# Altium PCB NTC.PcbDoc
Units mm, origin at the board's own origin, x right, y up, seen from the top; angles counter-clockwise.
Board outline 48.89 x 31.11 mm, 2 copper layers (Top Layer, Bottom Layer); 15 components, 36 nets, 59 pads, 11 vias.
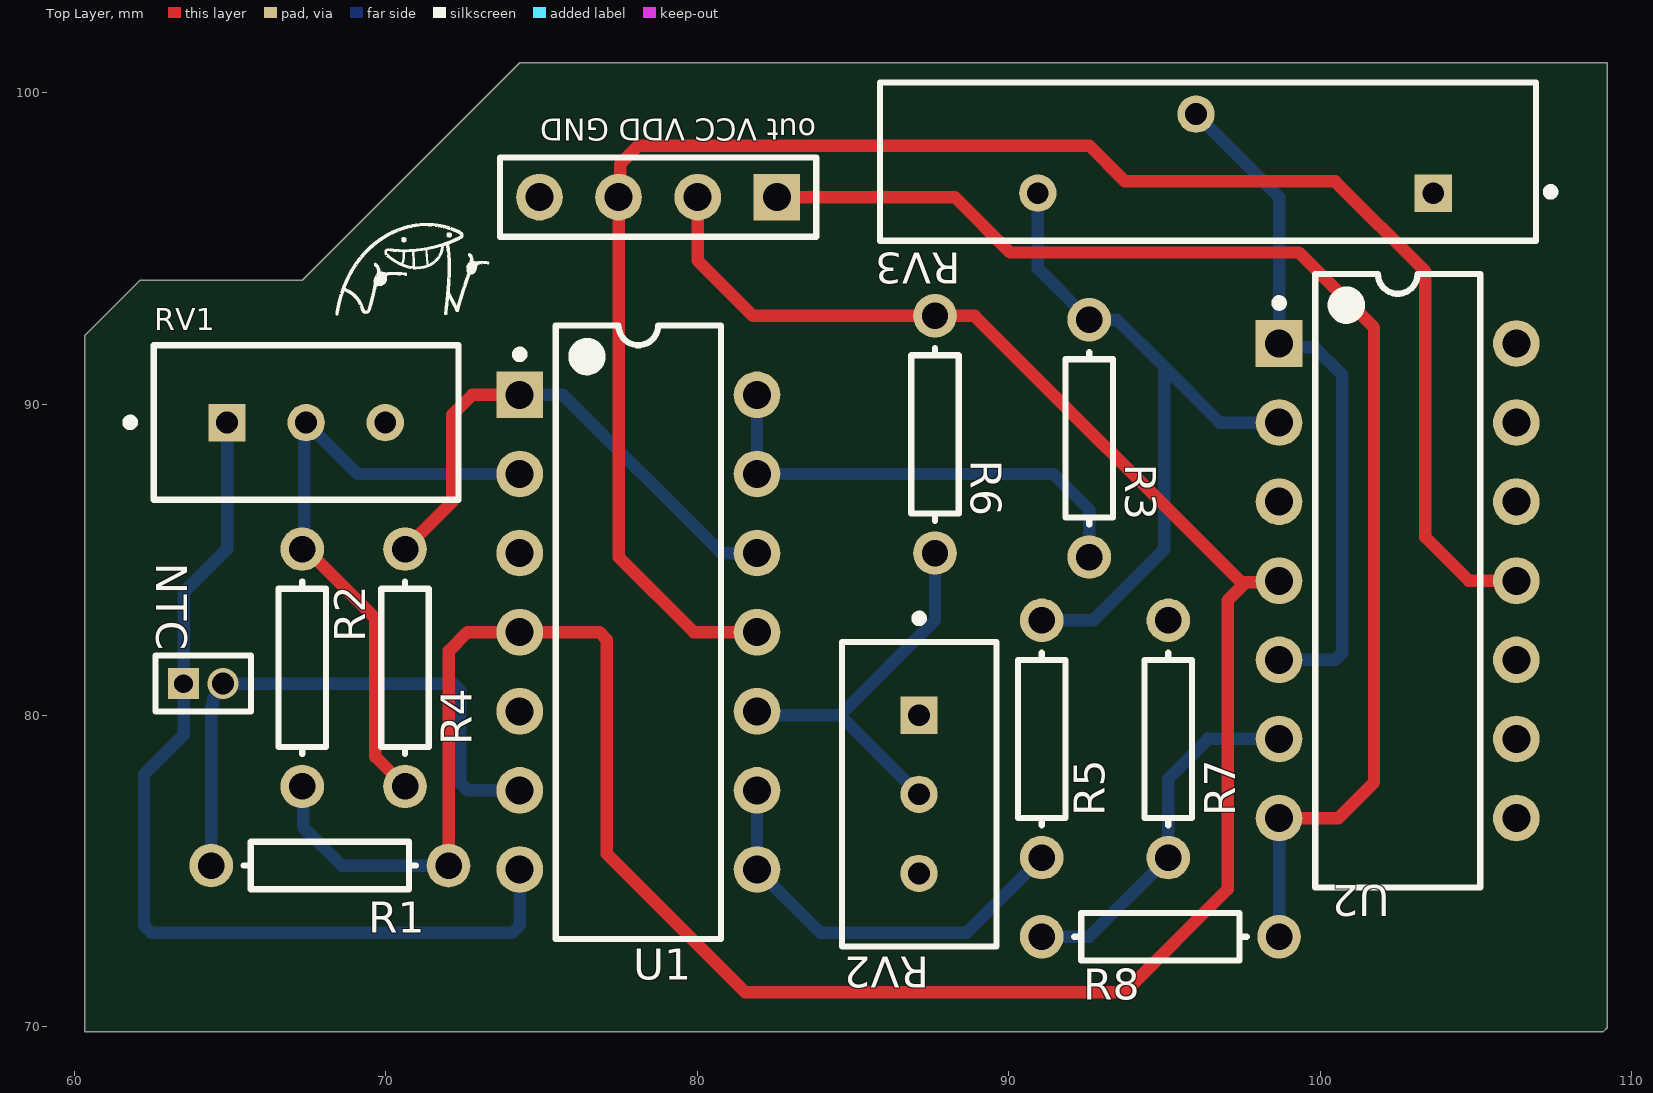
[diagram p0: Top Layer view]
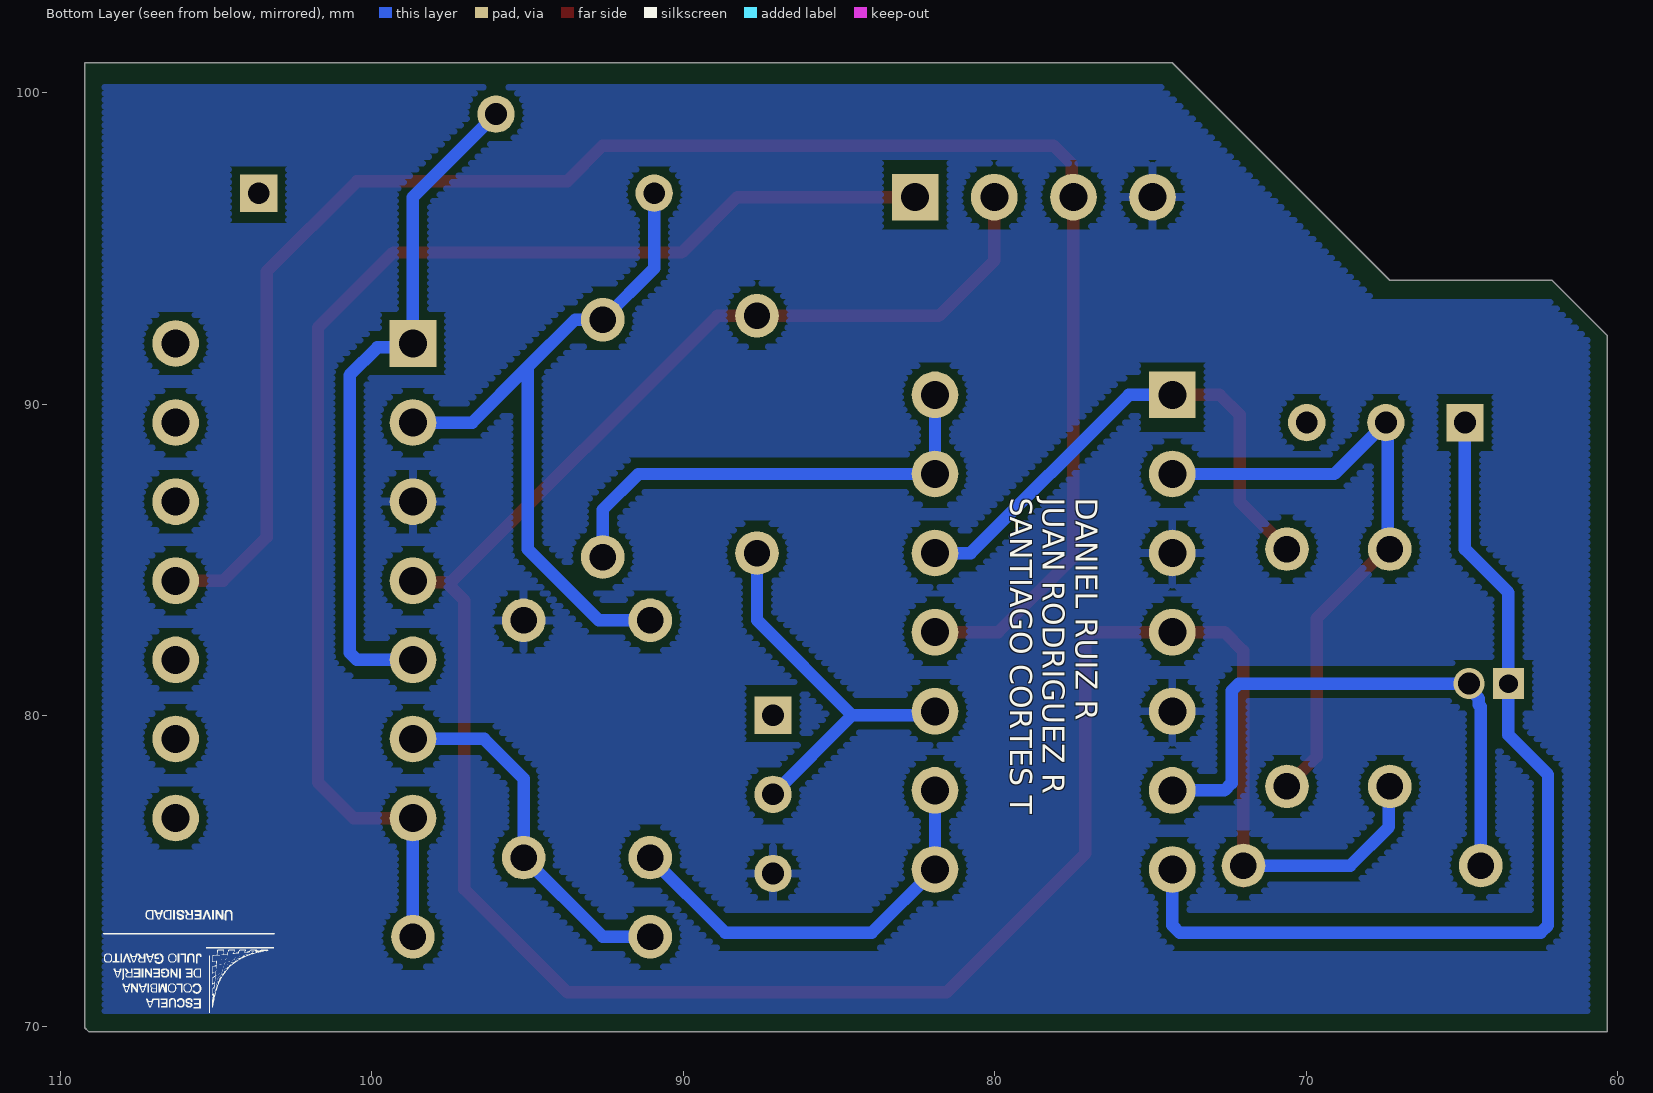
[diagram p1: Bottom Layer view, seen from below]

## Layer stack, top to bottom
Top Solder: solder mask 0.0102, Solder Resist, Dk 3.5
Top Layer: signal copper 0.0356
Dielectric 1: dielectric 0.32, FR-4, Dk 4.8
Bottom Layer: signal copper 0.0356
Bottom Solder: solder mask 0.0102, Solder Resist, Dk 3.5

## Board outline
60.325,69.85 60.325,92.202 62.103,93.98 67.31,93.98 74.295,100.965 109.22,100.965 109.22,69.977 109.093,69.85

## Design rules (kind name [scope] priority, off if disabled: settings)
Clearance Clearance_1 [All] p1: gap=0.25 ignorepadtopadclearanceinfootprint=FALSE
PlaneConnect [InNet('GND')] p1: planeconnectstyle=Relief reliefexpansion=0 reliefentries=4 reliefconductorwidth=0 reliefairgap=0
PolygonConnect [All] p1: connectstyle=Relief reliefconductorwidth=0.254 reliefentries=4 polygonreliefangle="90 Angle" airgapwidth=0.254
RoutingVias [All] p1: holewidth=0.711 width=1.27 viastyle="Through Hole" minholewidth=0.711 minwidth=1.27 maxholewidth=0.711 maxwidth=1.27
SolderMaskExpansion [All] p1: expansion=0.102 istentingtop=FALSE
Width [All] p1: maxlimit=5 minlimit=0.254 preferedwidth=0.4
29 further rules are at their usual default settings.

## Classes and differential pairs
component class Micro: D? R? U4

## Components (designator, comment, footprint, x,y, rotation, side; value= is the part's Value field where it differs from the comment)
NTC "Thermoresistor" MHDR1X2 63.5,81.026 r0 top
"out VCC VDD GND" "Header 4" HDR1X4 82.55,96.647 r180 top (schematic designator IN/OUT)
R1 "Res1" AXIAL-0.3 68.199,75.184 r0 top value=100k
R2 "Res1" AXIAL-0.3 67.31,81.534 r270 top value=100k
R3 "Res1" AXIAL-0.3 92.583,88.9 r90 top value=1K
R4 "Res1" AXIAL-0.3 70.612,81.534 r90 top value=10k
R5 "Res1" AXIAL-0.3 91.059,79.248 r90 top value=1K
R6 "Res1" AXIAL-0.3 87.63,89.027 r90 top value=10k
R7 "Res1" AXIAL-0.3 95.123,79.248 r90 top value=10k
R8 "Res1" AXIAL-0.3 94.869,72.898 r0 top value=100k
RV1 "3296W-1-504LF" FP-3296W-MFG 67.437,89.413 r180 top value=725
RV2 "3296W-1-504LF" FP-3296W-MFG 87.122,77.47 r90 top value=725
RV3 "3006P-1-103LF" FP-3006P-MFG 96.397,97.789 r180 top
U1 "LF347N" N0014A 78.105,82.677 r0 top
U2 "LF347N" N0014A 102.489,84.328 r0 top

## Footprints (in the part's own frame and the unit in brackets; to place one, negate y for a bottom-side part, rotate by r counter-clockwise, add the part's x,y. Pads: shape width x height; smd on the part's side, far side on the other; paste and mask are expansions set on the pad)
AXIAL-0.3 [mm] "Axial Device, Thru-Hole; 2 Leads; 0.3 in Pin Spacing"
  round 1.4 hole 0.85: 1(-3.81,0) 2(3.81,0)
  silkscreen extent -2.77,-0.76 2.77,0.76
FP-3006P-MFG [mm]
  rect 1.2x1.2 hole 0.7 paste-2539.97 mask+0: 1(-7.235,1.015)
  round 1.2 hole 0.7 paste-2539.97 mask+0: 2(0.385,-1.525) 3(5.465,1.015)
  silkscreen extent -11.13,-2.54 10.54,2.54, body extent -10.64,-2.64 10.64,2.64, height 0.25
FP-3296W-MFG [mm]
  rect 1.2x1.2 hole 0.7 paste-2539.97 mask+0: 1(2.54,0.005)
  round 1.2 hole 0.7 paste-2539.97 mask+0: 2(0,0.005) 3(-2.54,0.005)
  silkscreen extent -4.89,-2.48 5.77,2.48, body extent -4.99,-2.58 4.99,2.58, height 0.25
HDR1X4 [mm] "Connector; Header; 4 Position"
  rect 1.5x1.5 hole 0.9: 1(0,0)
  round 1.5 hole 0.9: 2(2.54,0) 3(5.08,0) 4(7.62,0)
  silkscreen extent -1.27,-1.27 8.89,1.27
MHDR1X2 [mm] "Connector; Header; 2 Position"
  rect 1x1 hole 0.6: 1(0,0)
  round 1 hole 0.6: 2(1.27,0)
  silkscreen extent -0.9,-0.9 2.17,0.9
N0014A [mm] "DIP, 14-Leads, Body 19.7x6.6mm, Pitch 2.54mm"
  rect 1.5x1.5 hole 0.9: 1(-3.81,7.62)
  round 1.5 hole 0.9: 2(-3.81,5.08) 3(-3.81,2.54) 4(-3.81,0) 5(-3.81,-2.54) 6(-3.81,-5.08) 7(-3.81,-7.62) 8(3.81,-7.62) 9(3.81,-5.08) 10(3.81,-2.54) 11(3.81,0) 12(3.81,2.54) 13(3.81,5.08) 14(3.81,7.62)
  silkscreen extent -3.93,-9.85 2.65,9.85, body extent -3.95,-9.85 3.95,9.85, height 5.08

## Part data
NTC: library part MHDR1X2, "Header, 2-Pin", LatestRevisionDate=17-Jul-2002, LatestRevisionNote="Re-released for DXP Platform.", Publisher="Altium Limited"
"out VCC VDD GND": "Header, 4-Pin / 1 for out / 2 for Vcc / 3 for Vdd / 4 for GND", LatestRevisionDate=17-Jul-2002, LatestRevisionNote="Re-released for DXP Platform.", Publisher="Altium Limited"
R1 R2 R3 R4 R5 R6 R7 R8: "Resistor", LatestRevisionDate=17-Jul-2002, LatestRevisionNote="Re-released for DXP Platform.", PackageDescription="Axial Device, Thru-Hole; 2 Leads; 0.3 in Pin Spacing", PackageReference=AXIAL-0.3, Published=8-Jun-2000, Publisher="Altium Limited"
RV1 RV2: library part CMP-2000-05583-2, "TRIMMER 500K OHM 0.5W PC PIN TOP", Manufacturer=Bourns, Package=3296W, Power Rating=0.5W, Resistance=1k, Temperature="-55°C to +125°C", Temperature Coefficient=100ppm/°C, Temperature Range High=+125°C, Temperature Range Low=-55°C, Tolerance=10%, Voltage Rating=300V, Automotive=No, Category=Res, ComponentLink2Description=Datasheet, ComponentLink2URL=https://www.bourns.com/docs/Product-Datasheets/3296.pdf, Device Class L1="Passive Components", Device Class L2=Resistors, Device Class L3="Variable Resistors and Potentiometers", Digikey Description="TRIMMER 500K OHM 0.5W PC PIN TOP", Height=12.05mm, Lead Free=Yes, Manufacturer Part Number=3296W-1-504LF, Mouser Description="Trimmer; Cermet; Rest 500 Kilohms; PCB; 25 Turns; Pwr-Rtg 0.5W", Octopart=https://octopart.com/3296w-1-504lf-bourns-143884, RoHS=TRUE, Series="Trimpot 3296-Sealed", Standoff Height=0.38mm
RV3: library part CMP-07234-000047-1, "TRIMMER 10KOHM 0.75W PC PIN SIDE", Color=Blue, Insulation Resistance=1GR, Manufacturer Series=3006, Max Operating Temperature=125°C, Max Power Dissipation=750mW, Min Operating Temperature=-55°C, Package Quantity=100, Resistance=50k, Resistance Law=Linear, Resistance Tolerance=10%, Resistor Type=Cermet, Temperature Coefficient=100ppm/°C, Actuator Orientation=Horizontal, Actuator Type=SCREW, Depth=4.83mm, Height=6.35mm, Lead Free="Lead Free", Length=20.57mm, Military Standard=Not, Mount=Panel, Number of Pins=3, Number of Terminals/Pins=3, Number of Turns=15, Packaging=Rail/Tube, Pin Diameter=0.6mm, Pitch=2.5mm, Power Rating=750mW, Radiation Hardening=No, REACH SVHC="No SVHC", RoHS Compliant=Yes, Series=3006, Taper=Linear, Technology=CERMET, Terminal Finish=Tin, Termination=Pin, Thickness=5.59mm, Tolerance=10%, Type=Potentiometer, Weight=0.04oz, Width=4.83mm
U1 U2: library part CMP-0055-00229-3, "Wide Bandwidth Quad JFET Input Operational Amplifier, 14-pin MDIP", Manufacturer="Texas Instruments", Package Reference=N0014A, PackageTopMarking=NSUZXYYTTE#*LF347N, PowerWise=N, Code_JEDEC=MS-001-AA, ComponentLink1Description="Datasheet URL", ComponentLink1URL=http://www.ti.com/general/docs/lit/getliterature.tsp?genericPartNumber=LF347&fileType=pdf, CompType=Amplifiers, PackageDescription="MDIP, .750 x .250 x.130in, 14 Lead, .100in Pitch", PinCount=14, RoHS=N

## Via types
v1: diameter 1.27, hole 0.711, Top Layer to Bottom Layer, 10 vias
v2: diameter 1, hole 0.711, Top Layer to Bottom Layer, 1 vias

## Nets (pads, with @x,y where several pads share a name; then routed paths per layer and width w, separated by ;. In a path a pad name is that pad's centre, name@x,y a point inside that pad or via, vN(x,y) a via of type N, cw(c..) or ccw(c..) an arc to the next point about the centre after c; other vN are vias at no path point)
GND: "out VCC VDD GND.4" R7.2 RV2.3 U1.3 U1.5 U2.3
NetC1_1: 
NetC2_2: 
NetC5_1: 
NetC6_2: 
NetD1_2: 
NetD3_2: 
NetD?_1: 
NetIN/OUT_1: "out VCC VDD GND.1" R8.2 U2.7 | length 42.8
  Top Layer w0.4: v1(82.55,96.647) 88.265,96.647 90.043,94.869 99.314,94.869 101.727,92.456 101.727,77.851 100.584,76.708 v1(98.679,76.708)
  Bottom Layer w0.4: R8.2 v1(98.679,76.708)
NetLM7805_1: 
NetLM7805_3: 
NetMO-in_3: 
NetMO-in_4: 
NetMO_out_2: 
NetMO_out_3: 
NetMO_out_4: 
NetNTC_1: NTC.1 RV1.1 U1.7 | length 31.3
  Bottom Layer w0.4: RV1.1 64.897,85.344 63.5,83.947 NTC.1 63.5,79.375 62.23,78.105 62.23,73.259 62.464,73.025 74.061,73.025 74.295,73.259 U1.7
NetNTC_2: NTC.2 R1.1 U1.6 | length 18.7
  Bottom Layer w0.4: R1.1 64.389,80.279 64.45,80.34 64.45,80.544 64.77,80.864 v2(64.77,81.026) 72.156,81.026 72.39,80.792 72.39,77.831 72.624,77.597 U1.6
NetP_galga_4: 
NetR2_1: R2.1 R4.1 RV1.2 U1.2 | length 20.7
  Top Layer w0.4: v1(67.31,85.344) 67.437,85.344 69.659,83.121 69.659,78.676 v1(70.612,77.724)
  Bottom Layer w0.4: v1(67.31,85.344) 67.373,85.407 67.373,89.344 RV1.2 69.088,87.757 U1.2
NetR3_1: R3.1 U1.13 U1.14 | length 15.2
  Bottom Layer w0.4: U1.14 U1.13 91.44,87.757 92.583,86.614 R3.1
NetR3_2: R3.2 R5.2 RV3.3 U2.2 | length 22.9
  Bottom Layer w0.4: RV3.3 90.932,94.361 R3.2 93.472,92.71 94.996,91.186 ; R5.2 92.71,83.058 94.996,85.344 94.996,91.186 ; U2.2 96.774,89.408 94.996,91.186
NetR4_2: R4.2 U1.1 U1.12 | length 17.1
  Top Layer w0.4: v1(70.612,85.344) 72.136,86.868 72.136,89.662 72.771,90.297 v1(74.295,90.297)
  Bottom Layer w0.4: v1(74.295,90.297) 75.692,90.297 80.772,85.217 U1.12
NetR5_1: R5.1 U1.8 U1.9 | length 13.5
  Bottom Layer w0.4: U1.9 U1.8 83.947,73.025 88.646,73.025 R5.1
NetR6_1: R6.1 RV2.2 U1.10 | length 12.8
  Bottom Layer w0.4: U1.10 82.042,80.01 84.577,80.01 ; RV2.2 84.577,80.01 ; R6.1 87.63,83.063 84.577,80.01
NetR7_1: R7.1 R8.1 U2.6 | length 11.7
  Bottom Layer w0.4: R8.1 92.583,72.898 R7.1 95.123,77.978 96.393,79.248 U2.6
NetR9_1: 
NetR10_2: 
NetR11_1: 
NetR11_2: 
NetR12_1: 
NetRV3_2: RV3.2 U2.1 U2.5 | length 22
  Bottom Layer w0.4: RV3.2 98.679,96.647 U2.1 98.806,91.821 99.822,91.821 100.711,90.932 100.711,82.022 100.477,81.788 U2.5
NetRV4_2: 
NetRV5_2: 
VCC: "out VCC VDD GND.2" R1.2 R2.2 R6.2 U1.4 U2.4 | length 84.6
  Top Layer w0.4: R1.2@72.009,74.676 72.023,74.69 72.023,82.075 72.624,82.677 v1(74.295,82.677) 76.855,82.677 77.089,82.443 77.089,75.565 81.534,71.12 93.726,71.12 97.028,74.422 97.028,83.693 97.616,84.281 ; 80.01,96.647 80.01,94.615 81.788,92.837 88.9,92.837 97.456,84.281 97.616,84.281 ; v1(98.679,84.328) 98.632,84.281 97.616,84.281
  Bottom Layer w0.4: R2.2 67.34,77.694 67.34,76.424 68.58,75.184 v1(72.009,75.184) ; 80.01,96.647 80.137,96.52
VDD: "out VCC VDD GND.3" U1.11 U2.11 | length 57.9
  Top Layer w0.4: U1.11 79.883,82.677 77.47,85.09 v1(77.47,96.647) 77.517,96.694 77.517,97.71 78.105,98.298 92.583,98.298 93.726,97.155 100.477,97.155 103.378,94.254 103.378,85.725 104.775,84.328 U2.11
pads on no net: RV1.3 RV2.1 RV3.1 U2.8 U2.9 U2.10 U2.12 U2.13 U2.14

## Polygon pours and split planes (outlines as drawn)
GND on Bottom Layer "GND" (hatched Horizontal grid 0 track 0.203, pour order 0): 62.23,93.345 60.96,92.075 60.96,70.485 108.585,70.485 108.585,100.33 74.803,100.33 67.818,93.345

## Silkscreen, mask and mechanical layers (free items; w line width, h text height)
Top Overlay:
  drawing of 3 lines, arcs and shapes, not listed
Bottom Overlay:
  drawing of 58 lines, arcs and shapes, not listed
  text "DANIEL RUIZ R / JUAN RODRIGUEZ R / SANTIAGO CORTES T" at 79.502,86.995 h0.7 r90
Mechanical 1:
  lines w0.254: 60.325,69.85 109.093,69.85 109.22,69.977 109.22,100.965 74.93,100.965 74.295,100.965 67.31,93.98 62.103,93.98 60.325,92.202 60.325,69.85

## Dimensions
109.093,69.85 to 60.325,69.85 on Mechanical 1
109.22,69.977 to 109.22,100.965 on Mechanical 1